# Altium PCB BSPD_PCB.PcbDoc
Units mm, origin at the board's own origin, x right, y up, seen from the top; angles counter-clockwise.
Board outline 68.96 x 80.9 mm, 2 copper layers (Top Layer, Bottom Layer), stack 1.071 mm thick; 18 components, 16 nets, 90 pads, 0 vias.
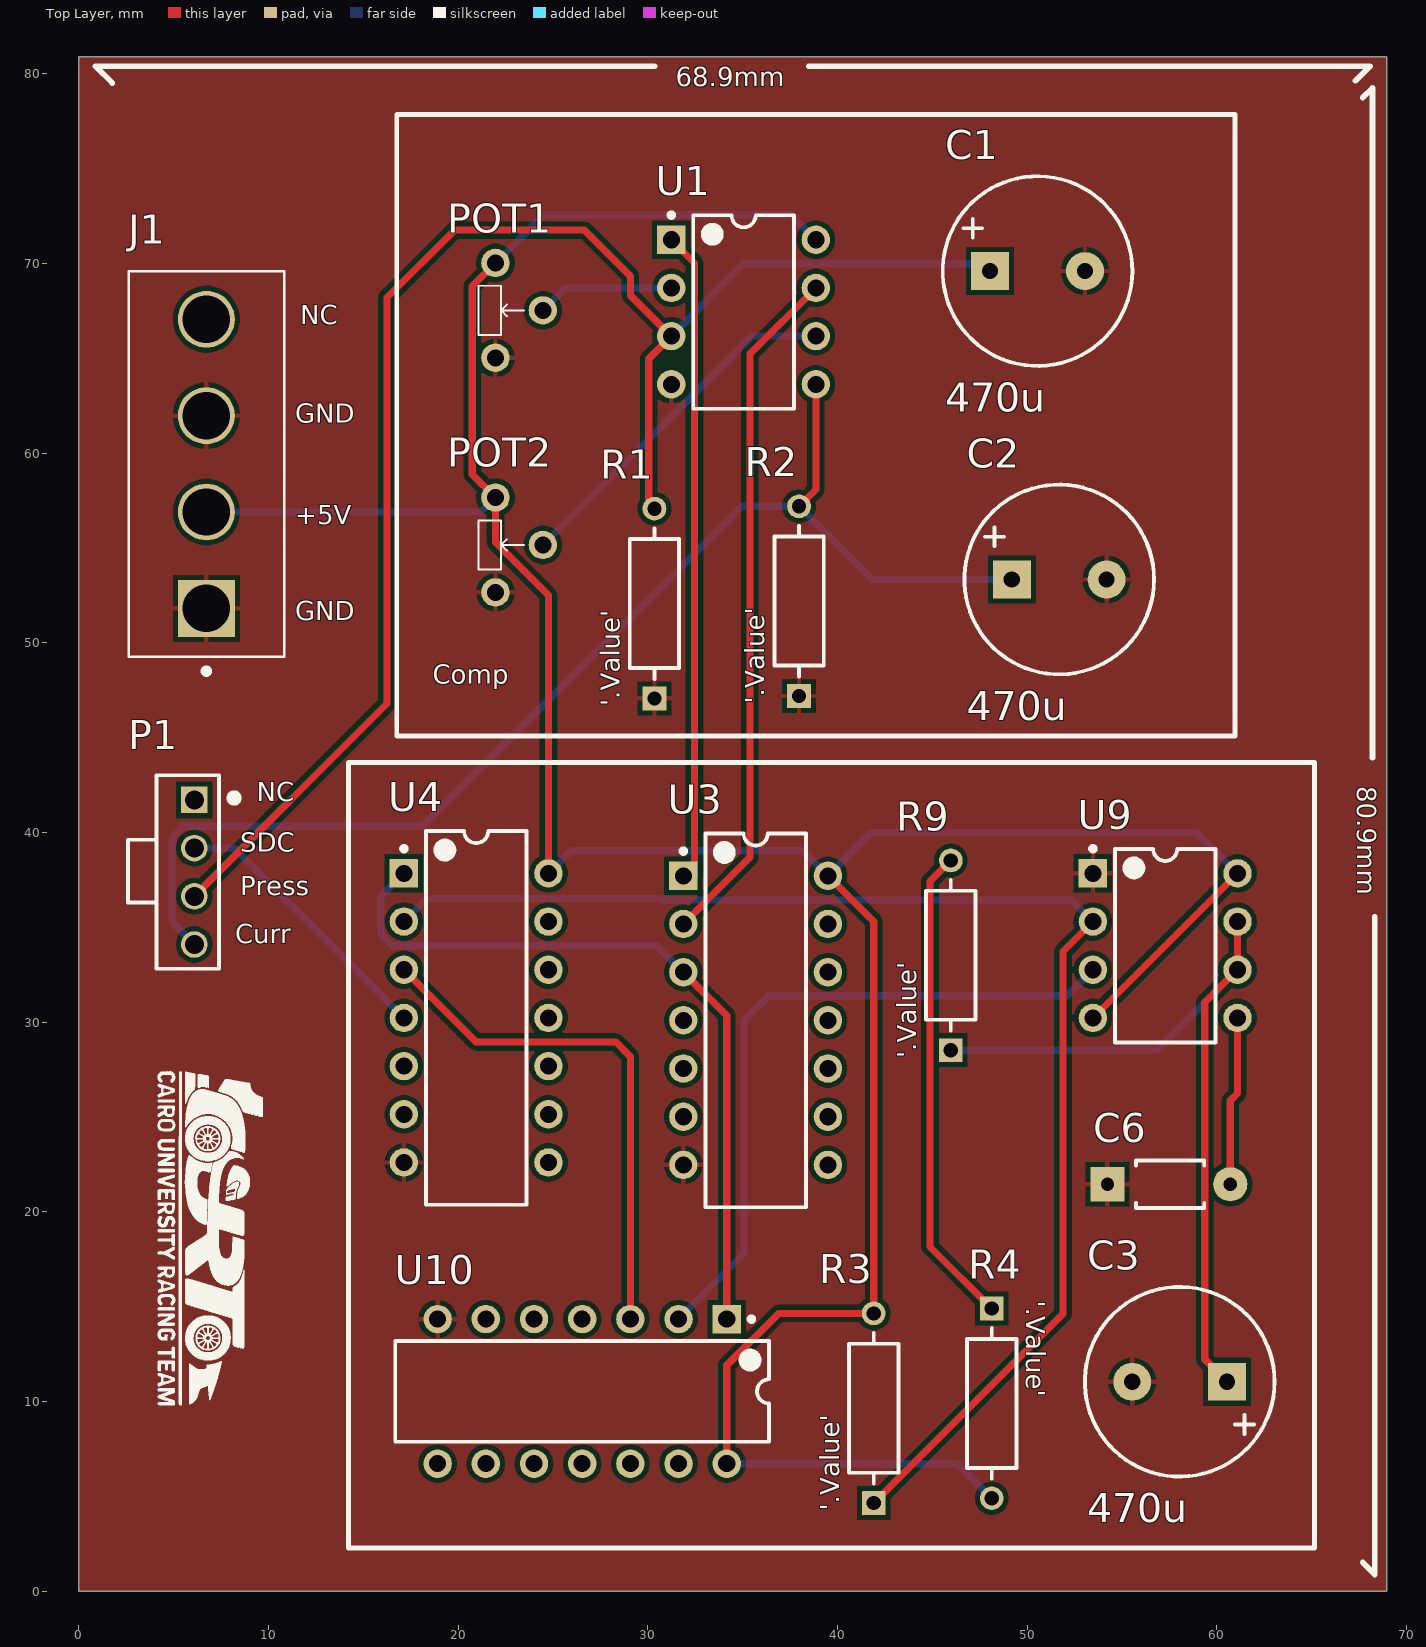
[diagram p0: Top Layer view]
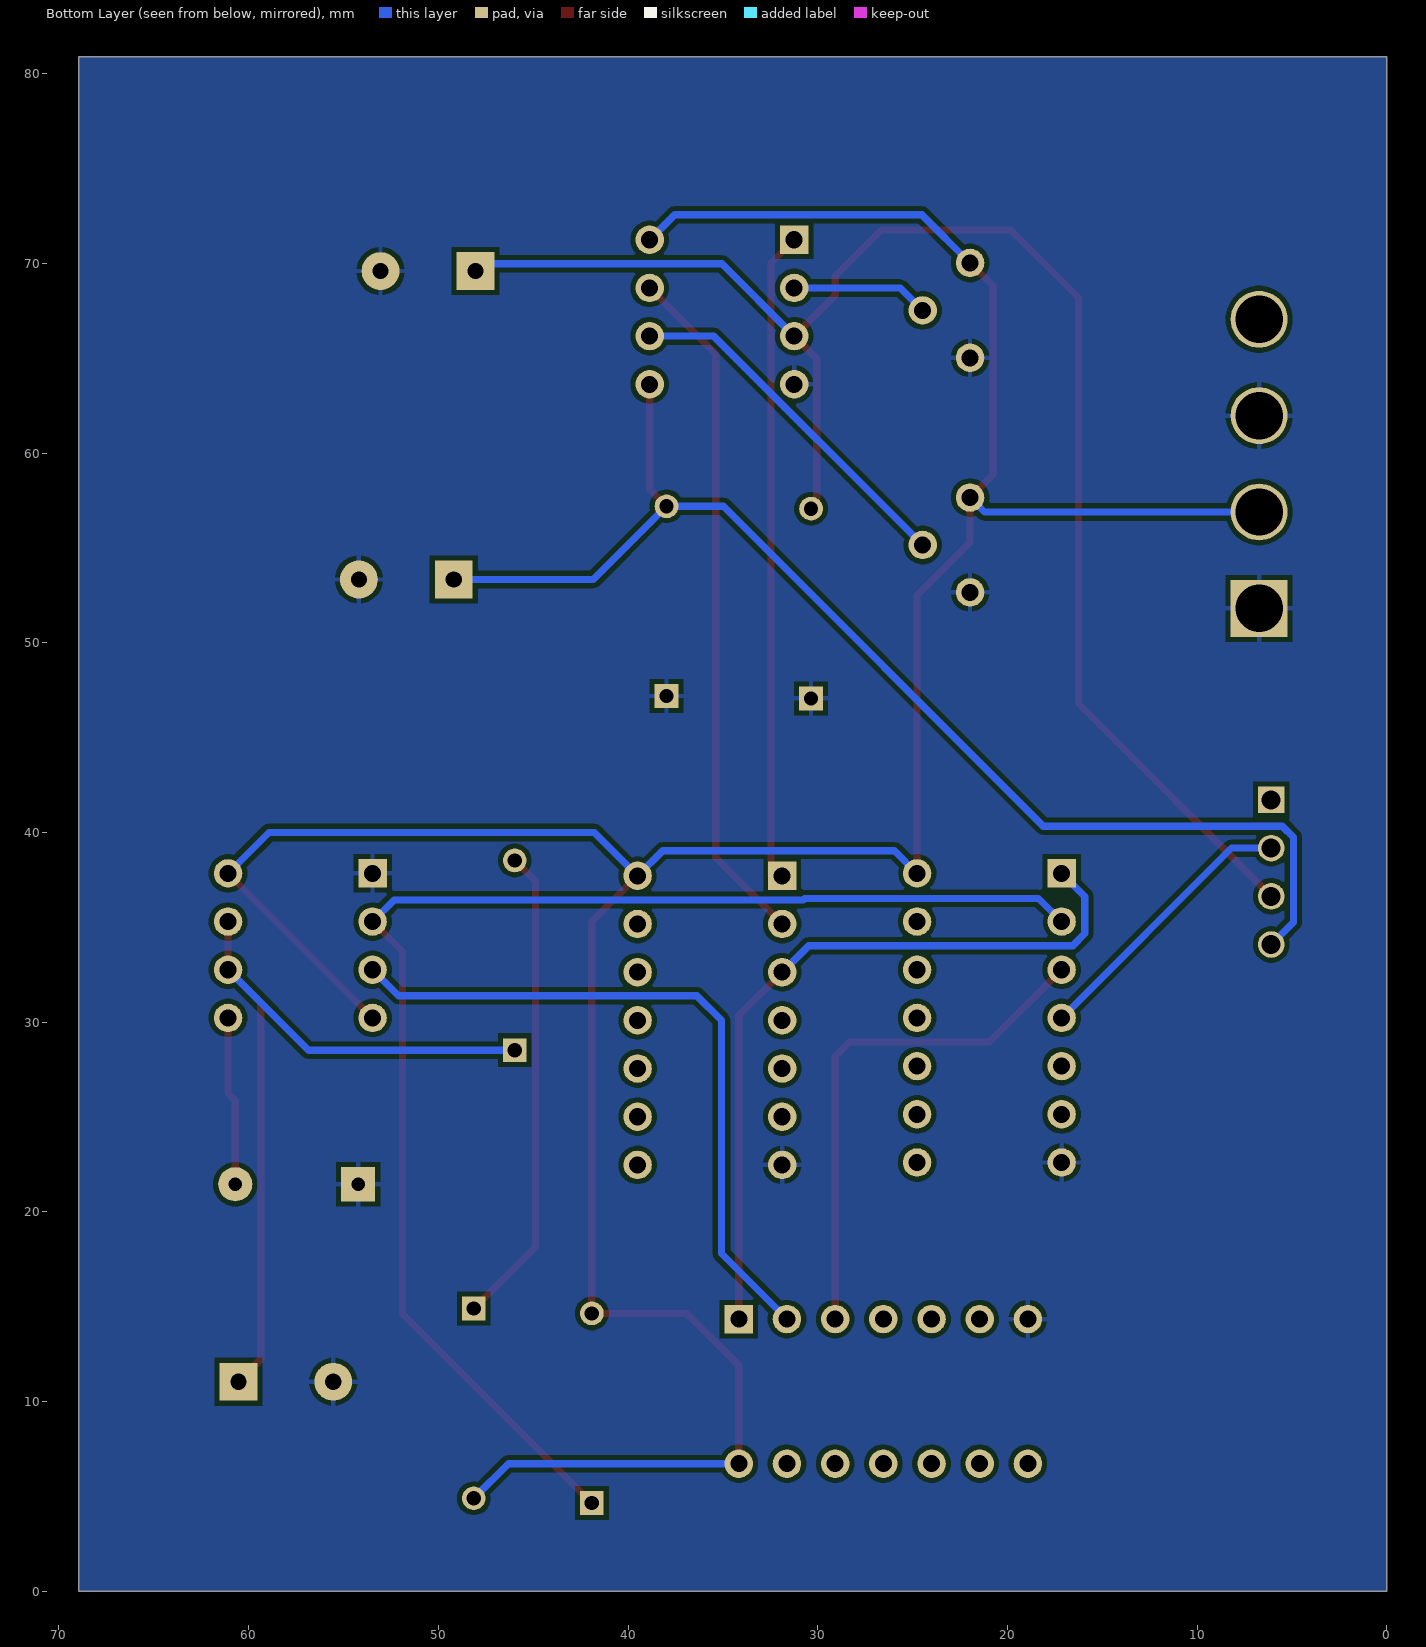
[diagram p1: Bottom Layer view, seen from below]

## Layer stack, top to bottom
Top Solder: solder mask 0.0102, Solder Resist, Dk 3.5
Top Layer: signal copper 0.0356
Dielectric 1: dielectric 1, FR-4, Dk 4.8
Bottom Layer: signal copper 0.0356
Bottom Solder: solder mask 0.0102, Solder Resist, Dk 3.5

## Board outline
0,0 68.961,0 68.961,80.899 0,80.899

## Design rules (kind name [scope] priority, off if disabled: settings)
Clearance [All] p1: gap=0.254 ignorepadtopadclearanceinfootprint=FALSE except(0: Arc-Hole Track-Hole SMDPad-Hole THPad-Hole Via-Hole Fill-Hole Poly-Hole Region-Hole Text-Hole)
HoleSize [All] p1: absolutevalues=TRUE maxlimit=6.3 minlimit=0.2 maxpercent=80.000 minpercent=20.000
PolygonConnect [All] p1: connectstyle=Relief reliefconductorwidth=0.254 reliefentries=4 polygonreliefangle="90 Angle" airgapwidth=0.254
RoutingVias [All] p1: holewidth=0.711 width=1.27 viastyle="Through Hole" minholewidth=0.711 minwidth=1.27 maxholewidth=0.711 maxwidth=1.27
SolderMaskExpansion [All] p1: expansion=0.102 istentingtop=FALSE
Width [All] p1: maxlimit=0.5 minlimit=0.254 preferedwidth=0.381
29 further rules are at their usual default settings.

## Components (designator, comment, footprint, x,y, rotation, side; value= is the part's Value field where it differs from the comment)
C1 "470u" NIC-UVR-10x12.5-2_V 50.546,69.596 r0 top
C2 "470u" NIC-UVR-10x12.5-2_V 51.689,53.34 r0 top
C3 "470u" NIC-UVR-10x12.5-2_V 58.039,11.049 r180 top
C6 "10n" FP-RCE0K1-MFG 57.531,21.463 r0 top
J1 "282837-4" TE_282837-4 6.731,51.816 r90 top
P1 "4x1 connector" 64900411122 6.096,41.719 r90 top
POT1 "10K" POT_trimmer 21.971,70.024 r270 top
POT2 "10K" POT_trimmer 21.971,57.658 r270 top
R1 "CMP-03413-000001-1" FP-MFR-25-MFG 30.353,52.07 r90 top value=1k
R2 "CMP-03413-000001-1" FP-MFR-25-MFG 37.973,52.197 r90 top value=1k
R3 "CMP-03413-000001-1" FP-MFR-25-MFG 41.91,9.652 r90 top value=10k
R4 "CMP-03413-000001-1" FP-MFR-25-MFG 48.133,9.906 r270 top value=10k
R9 "CMP-03413-000001-1" FP-MFR-25-MFG 45.974,33.528 r90 top value=10k
U1 "LM358P" P0008A 35.052,67.437 r0 top
U3 "CD74HC08E" N0014A 35.687,30.099 r0 top
U4 "SN7404N" N0014A 20.955,30.226 r0 top
U9 "NE555P" P0008A 57.277,34.036 r0 top
U10 "SN74LS32N" N0014A 26.543,10.541 r270 top

## Footprints (in the part's own frame and the unit in brackets; to place one, negate y for a bottom-side part, rotate by r counter-clockwise, add the part's x,y. Pads: shape width x height; smd on the part's side, far side on the other; paste and mask are expansions set on the pad)
64900411122 [mm] "4.20mm Male Single Row Vertical Header, 4p"
  rect 1.4x1.4 hole 1: 1(0,0)
  round 1.4 hole 1: 2(-2.54,0) 3(-5.08,0) 4(-7.62,0)
  silkscreen extent -8.9,-2.3 1.3,3.5
FP-MFR-25-MFG [mm]
  rect 1.25x1.25 hole 0.75 paste-1000 mask+0: 1(-5,0)
  round 1.25 hole 0.75 paste-1000 mask+0: 2(5,0)
  silkscreen extent -3.97,-1.3 3.97,1.3, body extent -5.72,-1.4 5.72,1.4, height 0.25
FP-RCE0K1-MFG [mm]
  rect 1.8x1.8 hole 0.7: 1(-3.302,0)
  round 1.8 hole 0.7: 2(3.175,0)
  silkscreen extent -1.8,-1.25 1.8,1.25, body extent -3.2,-1.35 3.2,1.35, height 0.25
N0014A [mm] "DIP, 14-Leads, Body 19.7x6.6mm, Pitch 2.54mm"
  rect 1.5x1.5 hole 0.9: 1(-3.81,7.62)
  round 1.5 hole 0.9: 2(-3.81,5.08) 3(-3.81,2.54) 4(-3.81,0) 5(-3.81,-2.54) 6(-3.81,-5.08) 7(-3.81,-7.62) 8(3.81,-7.62) 9(3.81,-5.08) 10(3.81,-2.54) 11(3.81,0) 12(3.81,2.54) 13(3.81,5.08) 14(3.81,7.62)
  silkscreen extent -3.93,-9.85 2.65,9.85, body extent -3.95,-9.85 3.95,9.85, height 5.08
NIC-UVR-10x12.5-2_V [mm] "TH, 2-Leads, Dia 10mm, Body Length 14mm, Pitch 5mm"
  rect 2x2 hole 0.85: 1(-2.5,0)
  round 2 hole 0.85: 2(2.5,0)
  silkscreen extent -5,-5 5,5, body extent -5,-5 5,5, height 14
P0008A [mm] "DIP, 8-Leads, Body 10.15x6.6mm, Pitch 2.54mm"
  rect 1.5x1.5 hole 0.9: 1(-3.81,3.81)
  round 1.5 hole 0.9: 2(-3.81,1.27) 3(-3.81,-1.27) 4(-3.81,-3.81) 5(3.81,-3.81) 6(3.81,-1.27) 7(3.81,1.27) 8(3.81,3.81)
  silkscreen extent -3.93,-5.1 2.65,5.23, body extent -3.95,-5.07 3.95,5.07, height 5.08
POT_trimmer [mm]
  round 1.5 hole 0.9: 1(0,0) 2(2.5,2.5) 3(5,0)
  silkscreen extent 1.2,-0.9 3.8,1.5
TE_282837-4 [mm]
  rect 3x3 hole 2.5: 1(0,0)
  round 3 hole 2.5: 2(5.08,0) 3(10.16,0) 4(15.24,0)
  silkscreen extent -3.46,-4.1 17.78,4.1, body extent -2.46,-4.26 18.46,3.94, height 9.81

## Part data
C1 C2 C3: library part CMP-1217-00001-1, "Aluminum Electrolytic Capacitor, 63 V, -40 to 85 degC, 2-Pin CAP, RoHS", Capacitance Tolerance=+/-20%, Manufacturer=Nichicon, Operating Temperature="-40 to 85 degC", PartNumber=UVR1J101MPD1TD, Rated Capacitance="100 uF", Rated Voltage="63 V", ComponentLink1Description="Manufacturer URL", ComponentLink1URL=http://www.nichicon.co.jp/, ComponentLink2Description=Datasheet, ComponentLink2URL=http://nichicon-us.com/english/products/pdfs/e-vr.pdf, ComponentLink3Description="Package Specification", ComponentLink3URL=http://nichicon-us.com/english/products/pdfs/e-vr.pdf, DatasheetVersion=Sep-13, Mounting Technology="Through Hole", PackageDescription="2-Pin Through Hole Package, Dia 10 mm, Body Length 12.5 mm, Pitch 5 mm", Packing=Bulk, Rated Ripple@85 degC 120 Hz="300 mA", RoHS=TRUE
C6: library part CMP-06035-031680-1, "Cap Ceramic 1nF 50V C0G ±5% Radial 5mm +125°C Automotive Bulk", Capacitance=1nF, Case/Package=Radial, Dielectric=C0G, Max Operating Temperature=125°C, Min Operating Temperature=-55°C, Package Quantity=2000, Ratings=AEC-Q200, Resistor Type=Ceramic, Tolerance=5%, Voltage Rating=50V, Height=3.5mm, Height - Seated (Max)=0.138inch, Lead Diameter=0.5mm, Lead Pitch=0.197inch, Lead/Base Style="Formed Leads", Length=0.142inch, Mount="Through Hole", Packaging="Tape and Reel", Termination=Radial, Voltage Rating (DC)=50V, Width=0.098inch
J1: "4 Position Wire to Board Terminal Block Horizontal with Board 0.200 (5.08mm)", Package=None, Availability=Good, Check_prices=https://www.snapeda.com/parts/282837-4/TE%20Connectivity%20AMP%20Connectors/view-part/520354/?ref=eda, EU_RoHS_Compliance="Compliant with Exemptions", MF="TE Connectivity", MP=282837-4, Price=None, Purchase-URL=https://pricing.snapeda.com/search/part/282837-4/?ref=eda, SnapEDA_Link=https://www.snapeda.com/parts/282837-4/TE%20Connectivity%20AMP%20Connectors/view-part/520354/?ref=snap
P1: library part CMP-1502-00554-1, "THT Male Header WR-MPC4, Vertical, Single Row, pitch 4.2 mm, 4 pins", Contact Resistance=10mOhm, Manufacturer="Wurth Elektronik", Operating Temperature=-40to105degC, Package Reference=64900411122, Working Voltage=600VAC, Datasheet URL=https://katalog.we-online.de/em/datasheet/6490xx11122.pdf, Gender=Male, Manufacturer URL=http://www.we-online.de, Mounting Technology=THT, Orientation=Vertical, Packaging=Tray, Part Number=64900411122, Pin Number=4, Pitch=4.2mm, Publisher=WurthElektronik
POT1 POT2: library part Potentiometer, "Trimmer, 10K, 0.25W, 1TURN", Manufacturer=Piher, Manufacturer Part Number=PT15NV15-103A2020-S, Supplier Part Number 1=1993-1201-ND, Pricing 1="1=0.85000, 10=0.76200, 25=0.68840, 50=0.66380, 100=0.62690, 250=0.60236, 500=0.56548, 1000=0.46713, 5000=0.38108 (USD)", RoHS=No, Stock 1=9914, Supplier 1=Digi-Key
R1 R2 R3 R4 R9: "RES 1.18K OHM 1/4W 1% AXIAL", Manufacturer=Yageo, Manufacturer Part Number=MFR-25FBF52-1K18, Package=MFR-25, Power Rating=0.25W, Resistance=R, Temperature="-55°C to +155°C", Temperature Coefficient=100ppm/°C, Temperature Range High=+155°C, Temperature Range Low=-55°C, Tolerance=1%, Voltage Rating=250V, Automotive=No, Category=Res, ComponentLink2Description=Datasheet, ComponentLink2URL=https://www.yageo.com/upload/media/product/products/datasheet/lr/Yageo_LR_MFR_1.pdf, Composition="Metal Film", Device Class L1="Passive Components", Device Class L2=Resistors, Device Class L3="Through-Hole Resistors", Digikey Description="RES 1.18K OHM 1/4W 1% AXIAL", Height=2.6mm, Ipc Land Pattern Name=RESAD1000W75L680D260, Lead Free=Yes, Mouser Description="Metal Film Resistors 1.18K OHM 1/4W 1%", Octopart=https://octopart.com/mfr-25fbf52-1k18-yageo-56251681, RoHS=TRUE, Series=MFR
U1: library part CMP-2000-06549-1, "Dual Operational Amplifier, 3 to 32 V, 0 to 70 degC, 8-Pin PDIP (P), RoHS, Tape and Reel", Manufacturer="Technik Industrial", Package Description="8-Pin Double In-line Package, Body 9.59 x 6.35 mm, Pitch 2.54 mm", Package Reference=P8, Datasheet URL=http://www.ti.com/lit/ds/symlink/lm358.pdf, Datasheet Version="Rev. T, 04/2015", Manufacturer URL=http://www.technik.com.hk/, Mounting Technology=ThroughHole, Package URL=http://www.ti.com/lit/ml/mpdi001b/mpdi001b.pdf
U3: library part CMP-0777-00277-3, "High Speed CMOS Logic Quad 2-Input AND Gates, N0014A, TUBE", F @ Nom Voltage(Max)(Mhz)=70, Generic Part Number=CD74HC08, ICC @ Nom Voltage(Max)(mA)=0.02, Manufacturer="Texas Instruments", Operating Temperature Range(C)="-55 to 125", Rating=Catalog, tpd @ Nom Voltage(Max)(ns)=23, Voltage(Nom)(V)=5, Bits(#)=4, DatasheetVersion=SCHS118C, Input Type=CMOS, Output Drive (IOL/IOH)(Max)(mA)=-24/24, Output Type=CMOS, PackageReference=N0014A, Schmitt Trigger=No, Technology Family=HC, VCC(Max)(V)=6, VCC(Min)(V)=2
U4: library part CMP-1615-00872-2, "Hex inverters, N0014A, TUBE", F @ Nom Voltage(Max)(Mhz)=35, Generic Part Number=SN7404, ICC @ Nom Voltage(Max)(mA)=0.033, Manufacturer="Texas Instruments", Operating Temperature Range(C)="0 to 70", Rating=Catalog, tpd @ Nom Voltage(Max)(ns)=22, Voltage(Nom)(V)=5, Bits(#)=6, Code_JEDEC=MS-001, DatasheetVersion=SDLS029C, Input Type=TTL, Output Drive (IOL/IOH)(Max)(mA)=-0.4/16, Output Type=CMOS, PackageReference=N0014A, Schmitt Trigger=No, Technology Family=TTL, VCC(Max)(V)=5.25, VCC(Min)(V)=4.75
U9: library part CMP-2000-04954-1, "Precision Timer, 4.5 to 16 V, 0 to 70 degC, 8-Pin DIP, Pb-Free, Tube", Manufacturer=TexasInstruments, Maximum High Level Output Current=-200mA, Maximum Low Level Output Current=200mA, Operating Supply Voltage=5|9|12|15V, Package=8PDIP, Package Description="8-Pin Double In-line Package, Body 9.59 x 6.35 mm, Pitch 2.54 mm", Package Reference=P8, Category=Timer, Datasheet URL=http://www.ti.com/general/docs/lit/getliterature.tsp?genericPartNumber=NE555&fileType=pdf, Datasheet Version="Rev. I, 09/2014", Manufacturer URL=http://www.ti.com/, Number of Internal Timers=1, Package URL=http://www.ti.com/lit/ml/mpdi001b/mpdi001b.pdf, Packaging=Rail/Tube, Rad Hard=No, Type=Standard
U10: library part CMP-1573-00145-3, "Quad 2-input positive-OR gates, N0014A, TUBE", F @ Nom Voltage(Max)(Mhz)=35, Generic Part Number=SN74LS32, ICC @ Nom Voltage(Max)(mA)=0.038, Manufacturer="Texas Instruments", Operating Temperature Range(C)="0 to 70", Rating=Catalog, tpd @ Nom Voltage(Max)(ns)=22, Voltage(Nom)(V)=5, Bits(#)=4, Code_JEDEC=MS-001, DatasheetVersion=SDLS100, Input Type=TTL, Output Drive (IOL/IOH)(Max)(mA)=0.8/-16, Output Type=TTL, PackageReference=N0014A, PackageVersion=http://www.ti.com/lit/ml/mpdi002c/mpdi002c.pdf, VCC(Max)(V)=5.25, VCC(Min)(V)=4.75

## Nets (pads, with @x,y where several pads share a name; then routed paths per layer and width w, separated by ;. In a path a pad name is that pad's centre, name@x,y a point inside that pad or via, vN(x,y) a via of type N, cw(c..) or ccw(c..) an arc to the next point about the centre after c; other vN are vias at no path point)
10SEC: U9.3 U10.2 | length 36.7
  Bottom Layer w0.381: U10.2 35.077,17.805 35.077,30.099 36.373,31.394 52.095,31.394 U9.3
+5: J1.2 POT1.1 POT2.1 R3.2 R4.2 U1.8 U3.14 U4.14 U9.4 U9.8 U10.14 | length 171.2
  Top Layer w0.381: POT1.1 20.752,68.805 20.752,58.877 POT2.1 21.971,55.296 24.765,52.502 U4.14 ; U10.14 34.163,11.913 36.902,14.652 R3.2 41.91,35.306 U3.14 ; U9.4 U9.8
  Bottom Layer w0.381: J1.2 21.209,56.896 POT2.1 ; POT1.1 24.515,72.568 37.541,72.568 U1.8 ; U4.14 25.959,39.04 38.176,39.04 U3.14 41.783,40.005 58.928,40.005 U9.8 ; U10.14 46.308,6.731 R4.2
AND_OUT: U3.3 U4.1 U10.1 | length 39.7
  Top Layer w0.381: U3.3 34.163,30.353 U10.1
  Bottom Layer w0.381: U4.1 15.926,36.627 15.926,34.671 16.561,34.036 30.48,34.036 U3.3
Curr_Comp_out: U1.1 U3.1 | length 34.6
  Top Layer w0.381: U1.1 32.461,70.028 32.461,37.719 U3.1
Curr_Sens: C2.1 P1.4 R2.2 U1.5 | length 66
  Top Layer w0.381: R2.2 38.862,58.086 U1.5
  Bottom Layer w0.381: P1.4 4.928,35.267 4.928,39.751 5.512,40.335 18.11,40.335 34.972,57.197 R2.2 41.83,53.34 C2.1
GND: C1.2 C2.2 C3.2 C6.1 J1.1 J1.3 POT1.3 POT2.3 R1.1 R2.1 U1.4 U3.7 U4.7 U9.1 U10.7
NetC3_1: C3.1 R9.1 U9.6 U9.7 | length 42.3
  Top Layer w0.381: C3.1 59.36,12.228 59.36,31.039 U9.6 U9.7
  Bottom Layer w0.381: R9.1 56.849,28.528 U9.6
NetC6_2: C6.2 U9.5 | length 8.9
  Top Layer w0.381: C6.2 60.706,25.857 61.087,26.238 U9.5
NetPOT1_2: POT1.2 U1.2 | length 7.3
  Bottom Layer w0.381: POT1.2 25.654,68.707 U1.2
NetPOT2_2: POT2.2 U1.6 | length 19
  Bottom Layer w0.381: POT2.2 35.48,66.167 U1.6
NetR4_1: R4.1 R9.2 | length 25.4
  Top Layer w0.381: R9.2 44.882,37.436 44.882,18.157 R4.1
NetU4_3: U4.3 U10.3 | length 27.7
  Top Layer w0.381: U4.3 20.955,28.956 28.321,28.956 29.083,28.194 U10.3
NOT_And_out: R3.1 U4.2 U9.2 | length 72.8
  Top Layer w0.381: R3.1 51.892,14.634 51.892,33.731 U9.2
  Bottom Layer w0.381: U4.2 18.364,36.525 30.683,36.525 30.759,36.449 52.324,36.449 U9.2
Not_OR_out: P1.2 U4.4 | length 14.8
  Bottom Layer w0.381: P1.2 8.192,39.179 U4.4
Press_Comp_out: U1.7 U3.2 | length 36.4
  Top Layer w0.381: U3.2 35.382,38.684 35.382,65.227 U1.7
press_Sens: C1.1 P1.3 R1.2 U1.3 | length 83.6
  Top Layer w0.381: P1.3 16.256,46.799 16.256,68.199 19.812,71.755 26.67,71.755 29.083,69.342 29.083,68.326 U1.3 30.047,64.972 30.047,57.611 30.353,57.305 R1.2
  Bottom Layer w0.381: U1.3 35.052,69.977 48.046,69.977 C1.1
pads on no net: J1.4 P1.1 U3.4 U3.5 U3.6 U3.8 U3.9 U3.10 U3.11 U3.12 U3.13 U4.5 U4.6 U4.8 U4.9 U4.10 U4.11 U4.12 U4.13 U10.4 U10.5 U10.6 U10.8 U10.9 U10.10 U10.11 U10.12 U10.13

## Polygon pours and split planes (outlines as drawn)
GND on Top Layer "NONET_L-01_P-001" (solid, pour order 0): 0,80.899 68.961,80.899 68.961,0 0,0
GND on Bottom Layer "NONET_L-01_P-001" (solid, pour order 1): 0,80.899 68.961,80.899 68.961,0 0,0

## Silkscreen, mask and mechanical layers (free items; w line width, h text height)
Top Overlay:
  drawing of 56 lines, arcs and shapes, not listed
  text "68.9mm" at 31.469,79.348 h1
  text "NC" at 11.684,66.802 h1
  text "GND" at 11.43,61.595 h1
  text "+5V" at 11.43,56.261 h1
  text "GND" at 11.43,51.181 h1
  text "Comp" at 18.669,47.831 h1
  text "80.9mm" at 67.41,42.445 h1 r270
  text "NC" at 9.398,41.656 h1
  text "SDC" at 8.509,38.989 h1
  text "Press" at 8.509,36.703 h1
  text "Curr" at 8.255,34.163 h1